# EAGLE board RS232_2xNPN+DTR (EAGLE 7.6.0)
RS232 Adapter using two NPN Transistors
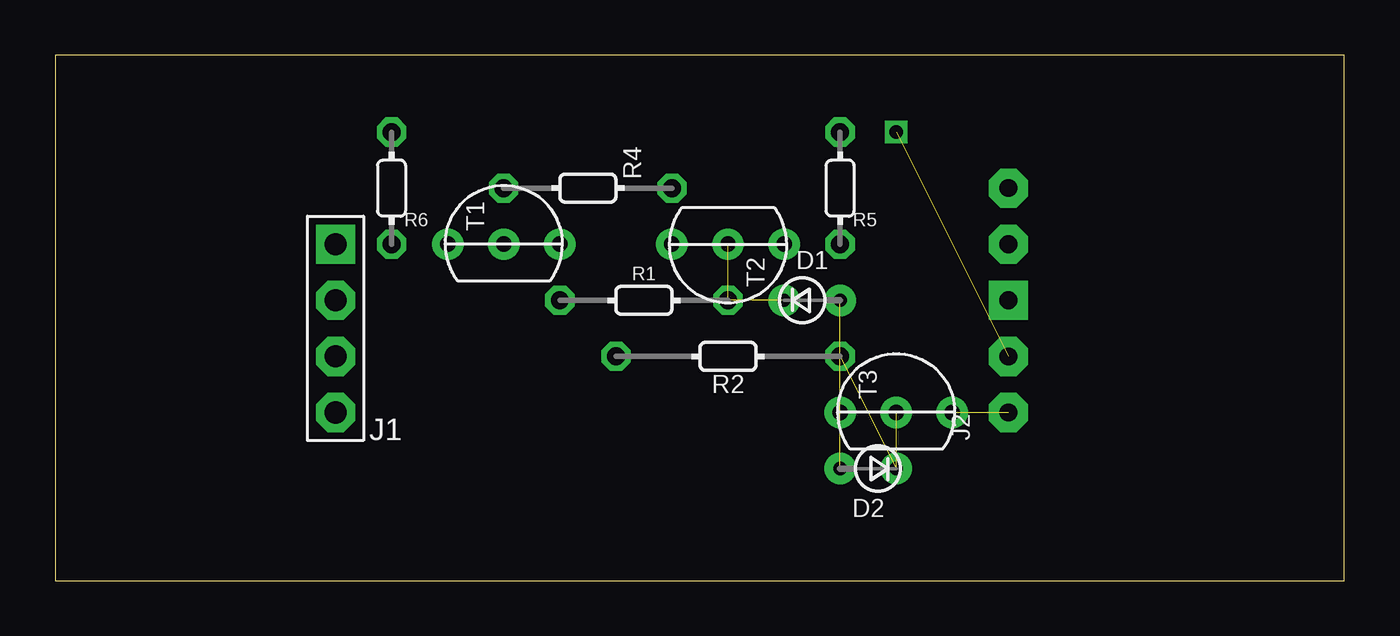
[diagram p0: board, top side]
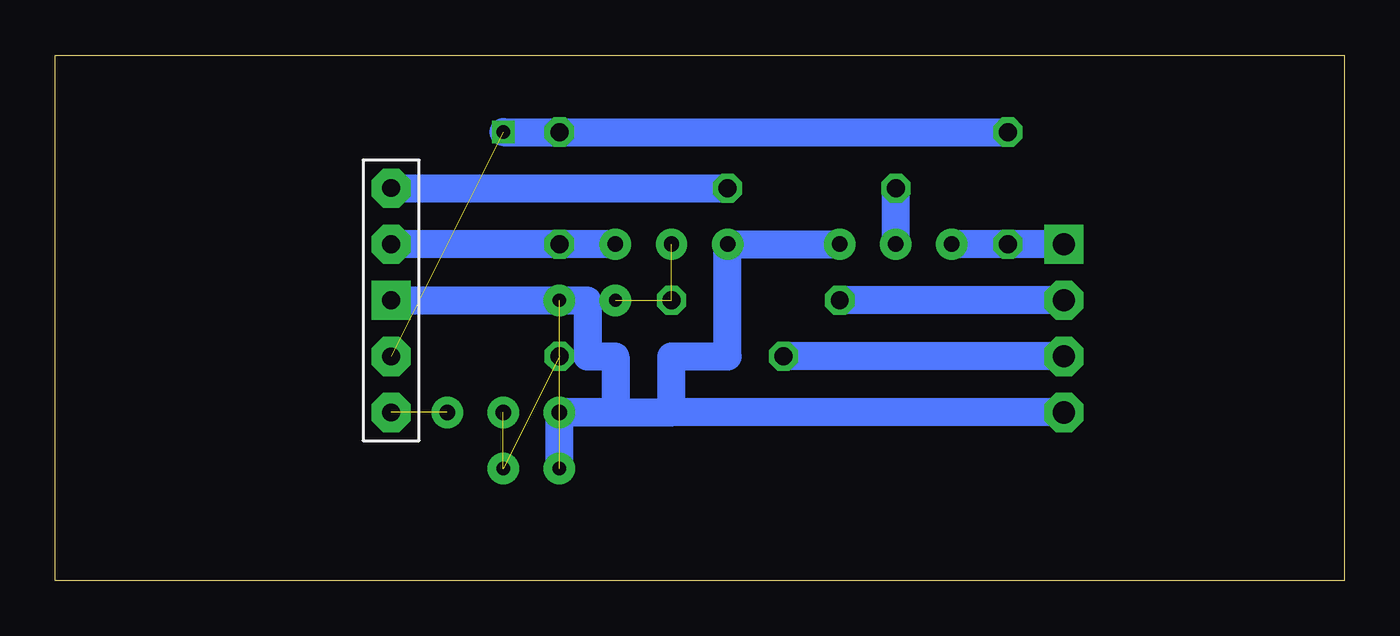
[diagram p1: board, bottom side, seen from below]

Size 58.4 x 23.8 mm. Coordinates in mm from the lower left corner, seen from the top.
Outline: 0,0 58.4,0 58.4,23.8 0,23.8 0,0
Copper layers (1*16): Top 0.035mm / dielectric 1.5mm / Bottom 0.035mm
Design rules "default": minimum track width 10mil, minimum drill 24mil, track to track 8mil, track to pad 8mil, pad to pad 8mil, via to via 8mil, smd to smd 8mil, copper to edge 40mil, drill to drill 8mil, minimum pad ring 10mil, minimum via ring 8mil, stop-mask expansion 4mil, vias tented up to drill 0mil, thermal gap 10mil
Net classes: 0 default: width 0.61 mm; 1 GND: width 0.61 mm

## Footprints (pad centres in the part's own frame; a part is rotated, then mirrored left to right if it is on the bottom)
DO34-2,5-A = drill 0.6 pad 1.422: A 1.27,0; C -1.27,0
RS232-4PIN-NEW-L = drill 1 pad 1.778 square: 1 0,-3.81 | drill 1 pad 1.778 octagon: 2 0,-1.27; 3 0,1.27; 4 0,3.81
PIC-UART-MCLR = drill 0.8 pad 1.778 octagon: 1 5.08,0; 17 -5.08,0; 18 -2.54,0; 20 2.54,0 | drill 0.8 pad 1.778 square: 19 0,0
0202/7 = drill 0.813 octagon: 1 -3.81,0; 2 3.81,0
0202/10 = drill 0.813 octagon: 1 -5.08,0; 2 5.08,0
0202/7-V = drill 0.813 octagon: 1 0,-3.81; 2 0,3.81
0202/5-V = drill 0.813 octagon: 1 0,2.54; 2 0,-2.54
TO92-CBE = drill 0.7 pad 1.422: B 0,0; C 0,2.54; E 0,-2.54

## Placement (x,y rotation side)
D1  1N4148  [DO34-2,5-A]  34.29,12.7 0 top
D2  1N4148  [DO34-2,5-A]  36.83,5.08 180 top
J1  COMPORT-4PIN-NEW-L  [RS232-4PIN-NEW-L]  12.7,11.43 180 top
J2  PIC-UART-MCLR  [PIC-UART-MCLR]  43.18,12.7 270 top
R1  10kΩ  [0202/7]  26.67,12.7 180 top
R2  10kΩ  [0202/10]  30.48,10.16 180 top
R4  4.7kΩ  [0202/7-V]  24.13,17.78 90 top
R5  1kΩ  [0202/5-V]  35.56,17.78 180 top
R6  1kΩ  [0202/5-V]  15.24,17.78 180 top
T1  BC547  [TO92-CBE]  20.32,15.24 90 top
T2  BC547  [TO92-CBE]  30.48,15.24 270 top
T3  BC557  [TO92-CBE]  38.1,7.62 90 top

## Library data of the parts
D1 D2 = d
J1 J2 = pinconn
R1 R2 R4-R6 = r
T1-T3 = t

## Nets
GND: D1.A D2.A J1.4 J2.19 T1.E T2.E T3.C
N$1: J2.18 R5.1 T2.C
N$2: D1.C R1.1 T2.B
N$3: J1.2 R1.2
N$4: J2.17 R4.1
N$5: R4.2 T1.B
N$6: D2.C R2.1 T3.B
N$7: J1.3 R2.2
N$8: J2.1 T3.E
N$9: J1.1 R6.1 T1.C
VDD: J2.20 R5.2 R6.2

## Tracks (layer width: path | path; a pad name or v marks a point on that pad's centre or on a via)
GND  (2 unrouted)
  Bottom 1.27: T1.E T2.E 27.94,10.16 30.48,10.16 30.48,7.62 | J2.19 D1.A 34.29,12.7 34.29,10.16 33.02,10.16 33.02,7.62 T3.C | D2.A T3.C | T3.C 30.48,7.62 | J1.4 30.48,7.62
N$1
  Bottom 1.27: T2.C R5.1 J2.18
N$2  (2 unrouted)
N$3
  Bottom 1.27: J1.2 R1.2
N$4
  Bottom 1.27: J2.17 R4.1
N$5
  Bottom 1.27: T1.B R4.2
N$6  (2 unrouted)
N$7
  Bottom 1.27: J1.3 R2.2
N$8  (1 unrouted)
N$9
  Bottom 1.27: J1.1 R6.1 T1.C
VDD  (via drill 0.6)  (1 unrouted)
  Bottom 1.27: v38.1,20.32 R5.2 R6.2